# Altium PCB LTE_GPS_433_V1.0.PcbDoc (part 2 of 2)
Units mil, origin at the board's own origin, x right, y up, seen from the top; angles counter-clockwise.
Board outline 3937.01 x 2362.2 mil, 4 copper layers (Top Layer, Mid-Layer 2, POWER, Bottom Layer); 243 components, 180 nets, 856 pads, 468 vias.
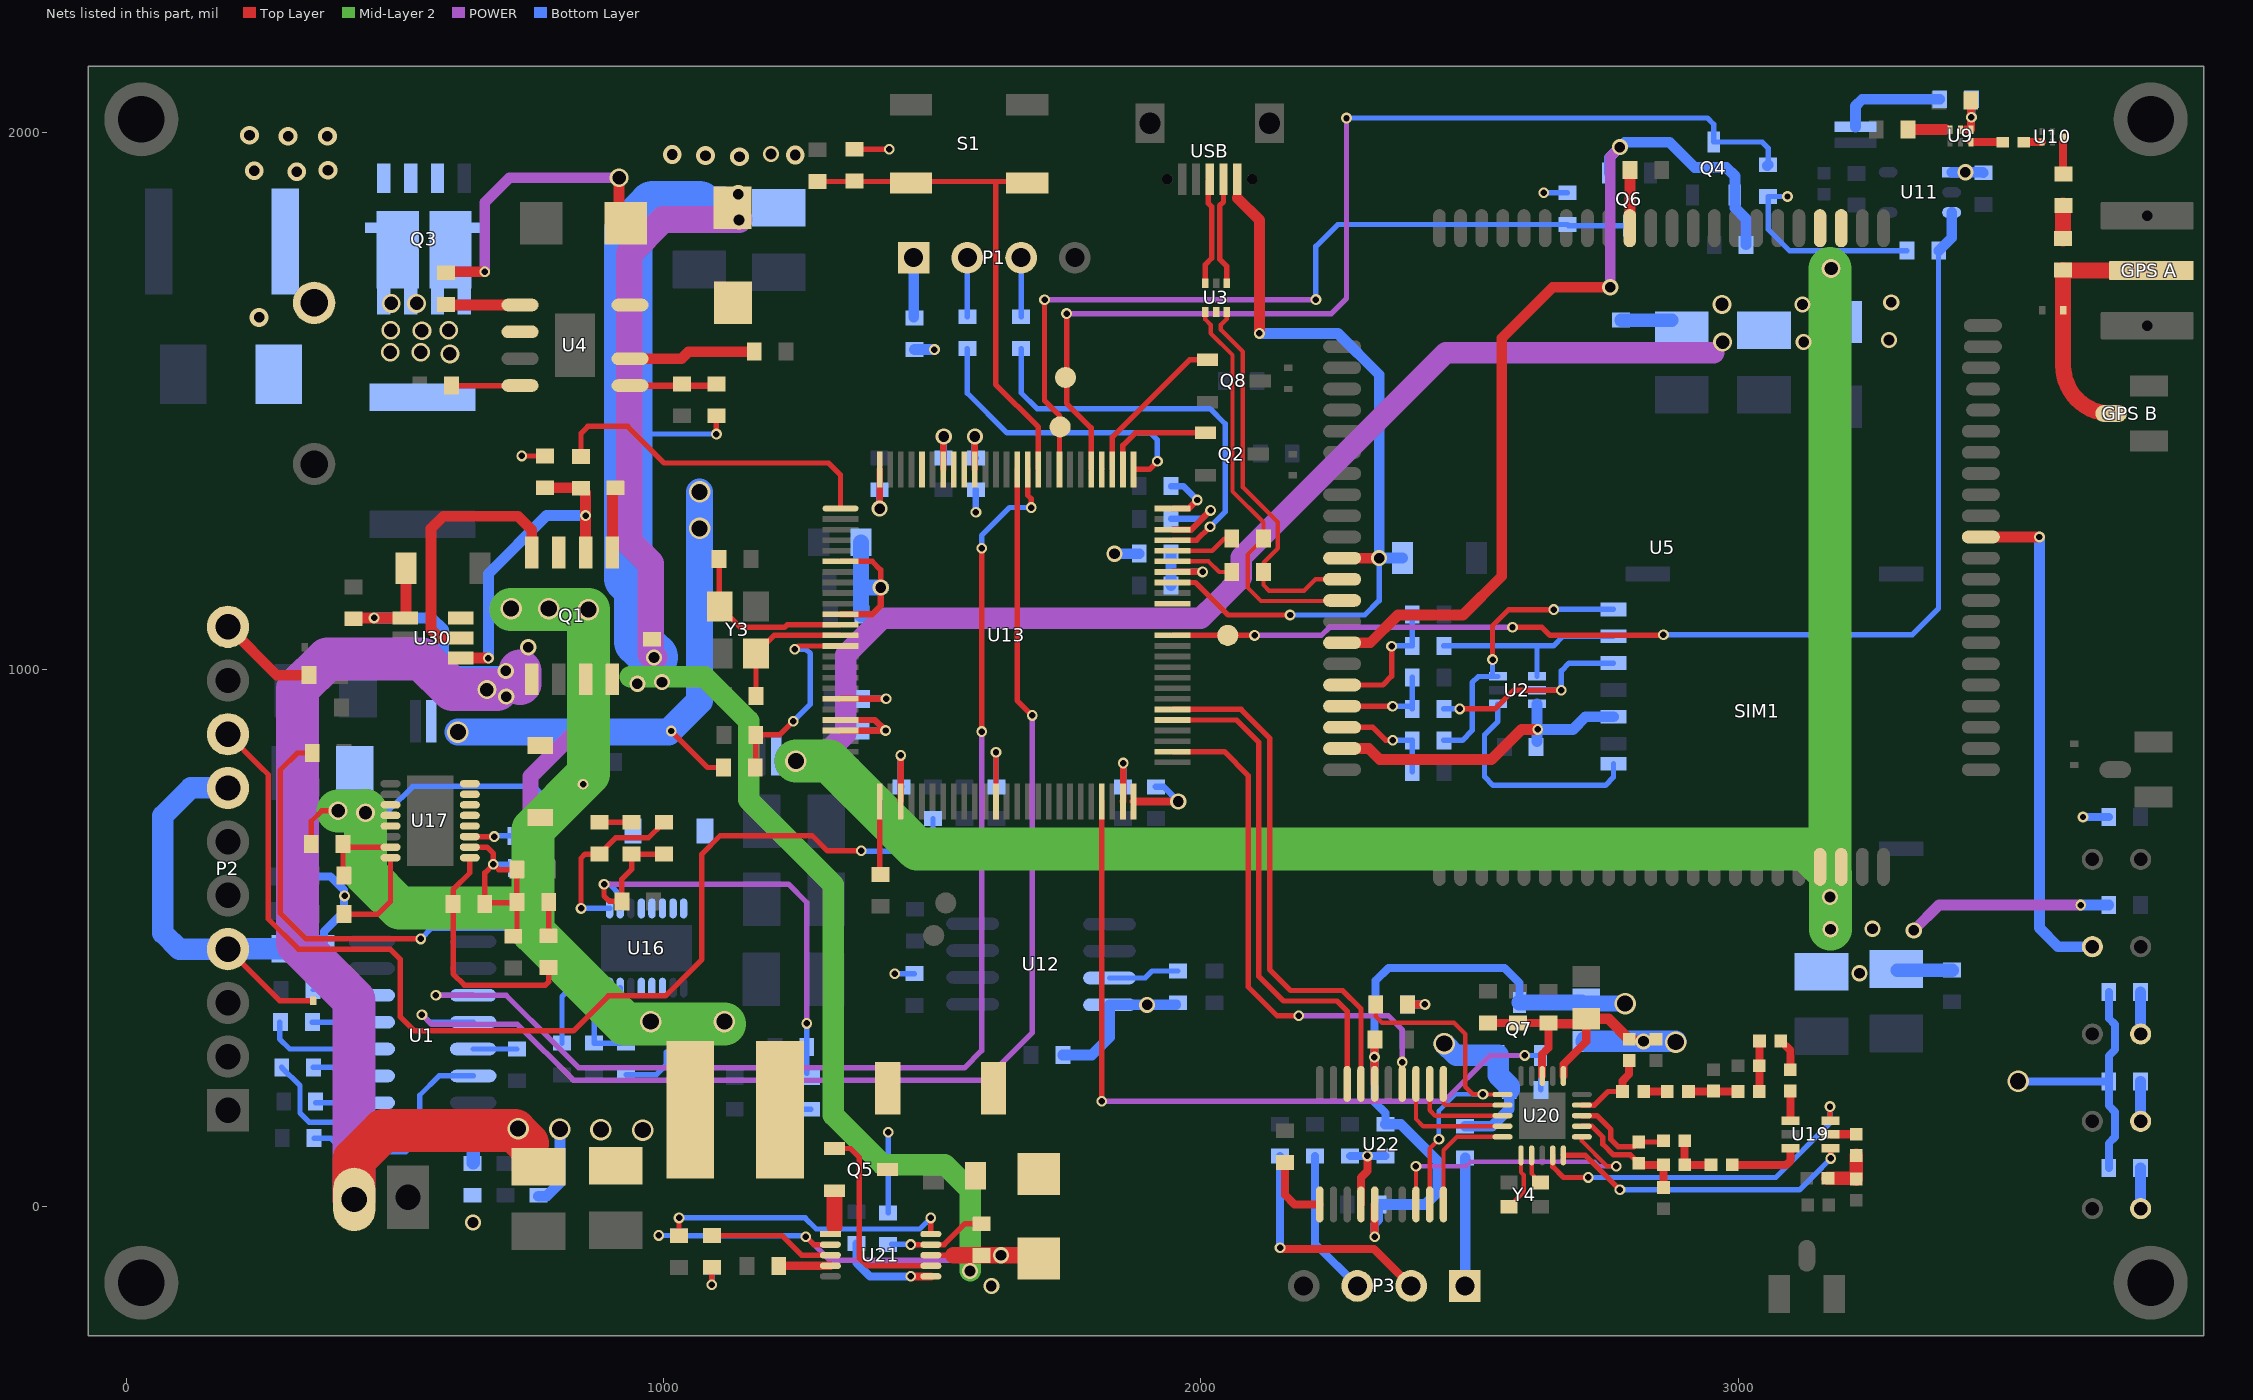
[diagram p4: the nets of this part, all layers, seen from the top]

## Via types
v1: diameter 20, hole 12, Top Layer to Bottom Layer, tented both sides, 317 vias
v2: diameter 30, hole 20, Top Layer to Bottom Layer, tented both sides, 93 vias
v3: diameter 40, hole 30, Top Layer to Bottom Layer, tented both sides, 20 vias
v4: diameter 35, hole 25, Top Layer to Bottom Layer, tented both sides, 15 vias
v5: diameter 35, hole 20, Top Layer to Bottom Layer, tented both sides, 13 vias
v6: diameter 25.98, hole 12.99, Top Layer to Bottom Layer, tented top, 8 vias
v7: diameter 30, hole 20, Top Layer to Bottom Layer, 1 vias
v8: diameter 59.06, hole 39.37, Top Layer to Bottom Layer, 1 vias

## Nets (pads, with @x,y where several pads share a name; then routed paths per layer and width w, separated by ;. In a path a pad name is that pad's centre, name@x,y a point inside that pad or via, vN(x,y) a via of type N, cw(c..) or ccw(c..) an arc to the next point about the centre after c; other vN are vias at no path point) (continued)
NetACPR_2: ACPR.2 U21.10 | length 548.5
  Top Layer w10: ACPR.2@1028.65,-53.39 v1(1028.65,-20.35) ; U21.10@1497.32,-50.35 v1@1497.32,-20.67
  Bottom Layer w10: v1(1028.65,-20.35) 1263.35,-20.35 1284,-41 1476.67,-41 v1(1497.32,-20.35)
NetAdapter_1: Adapter.1 C93.1 D3.2 Q3.1 Q3.2 Q3.3
  other v5: 247,1656 317,1927 238,1929 375,1930 301,1993 374,1993 229,1995
NetBACK_1: BACK.1 R39.2 | length 76.1
  Bottom Layer w20: R39.2@3749.06,73 3749.06,-2.74 BACK.1@3749.32,-3
NetC2_1: C2.1 Q3.5 Q3.6 Q3.7 Q3.8 U4.2
  other v4: 602,1588 491,1591 548,1591 550,1631 492,1632 600,1632 493,1682 540,1682
NetC33_1: C33.1 R21.1 U9.4 U9.5 | length 100.4
  Top Layer w15: 3423,2005.62 U9.4@3433.69,2005.62 C33.1@3433.69,2062
  Bottom Layer w15: v1(3434.32,2028.63) R21.1@3434.32,2062
NetC35_1: C35.1 R22.2 | length 60.6
  Top Layer w30: R22.2@3605,1803.06 C35.1@3605,1863.68
NetC35_2: C35.2 U10.1 | length 68.6
  Top Layer w15: C35.2@3605,1923.37 U10.1@3605,1992
NetC36_1: C36.1 U9.6 | length 69.3
  Top Layer w20: C36.1@3316.69,2005.62 3386,2005.62
NetC37_1: C37.1 D9.2 L9.1 U4.8 | length 537.3
  Top Layer w20: C37.1@600.32,1741 v1(667,1741) ; D9.2@917,1843.48 v4(917,1916)
  POWER w20: v1(667,1741) 667,1870 713,1916 v4(917,1916)
NetC37_2: C37.2 U4.1 | length 127.7
  Top Layer w20: C37.2@604.94,1679 U4.1@732.64,1679
NetC40_1: C40.1 C41.1 C161.2 D12.K L17.1 Q1.5 R27.2 U30.1 VBAT.2 | length 2524.9
  Top Layer w20: C161.2@423,1097.06 423.52,1096.53 v1(461,1096.53) U30.1@519.03,1096.53 520.2,1097.71 D12.K@520.2,1189
  Top Layer w80: VBAT.2@424,14.06 424,88 478,142 621.22,142 692.78,142 723,142 747,118
  POWER w80: VBAT.2@424,14.06 424,385 318.32,490.68 318.32,964.32 374,1020 550,1020 607,963 v4(671,963) 690,963 ; 733,974 733,998
  Bottom Layer w20: v1(461,1096.53) 568.47,1096.53 590,1075 590,1019 612.27,996.73 704.73,996.73 v2(706,998) ; R27.2@767,19.94 781.94,19.94 807,45 v3(807,145)
  other v2: 707,950 748,1042
  other v3: 961,143 883,144 729,146
NetC46_2: C46.2 C96.1 L14.2 | length 95.2
  Top Layer w25: L14.2@3167.21,53.63 C46.2@3218.37,53.63 ; C46.2@3220,52 C96.1@3220,96
NetC49_2: C49.2 U13.73 | length 165.6
  Top Layer w12: U13.73@1947.37,1260.85 1982.15,1260.85 v1(2018,1296.7)
  Bottom Layer w12: C49.2@1944.37,1281 2002.3,1281 v1(2018,1296.7)
NetC50_2: C50.2 U13.49 | length 115.9
  Top Layer w12: U13.49@1854.85,754.95 1855.32,755.41 v1(1855.32,826.32)
  Bottom Layer w12: C50.2@1855.32,782 v1(1855.32,826.32)
NetC64_1: C64.1 U1.1 | length 200.9
  Bottom Layer w10: C64.1@289,260 323,226 323,175 340,158 387,158 401,144 412,144
NetC64_2: C64.2 U1.3 | length 115.1
  Bottom Layer w10: C64.2@348.06,260 385,260 401,244 U1.3@456.51,244
NetC65_1: C65.1 U1.4 | length 210.4
  Bottom Layer w10: C65.1@285.06,344 285.06,312.94 304,294 U1.4@456.51,294
NetC65_2: C65.2 U1.5 | length 110.5
  Bottom Layer w10: C65.2@346.06,344 U1.5@456.51,344
NetC66_1: C66.1 U1.2 | length 139
  Bottom Layer w10: 386.51,194 352,194 U1.2@456.51,194
NetC67_1: C67.1 U1.6 | length 113.7
  Bottom Layer w8: C67.1@347,404 383,404 393,394 U1.6@456.51,394
NetC70_1: C70.1 U4.6 | length 236.7
  Top Layer w20: U4.6@937.36,1579 1033,1579 1046,1592 C70.1@1168.66,1592
NetC80_2: C80.2 R50.1 | length 71
  Bottom Layer w10: C80.2@1203.32,182 R50.1@1274.32,182
NetC81_1: C81.1 R55.1 | length 60
  Top Layer w10: R55.1@880.32,716 C81.1@940.31,716
NetC81_2: C81.2 C82.2 R49.1 R50.2 R58.2 U16.10 | length 987.5
  Top Layer w10: v1(889,601) 889,579 899,569 R58.2@922.26,569 922.26,610.26 940.31,628.31 C81.2@940.31,656.94 C82.2@1000.31,656.94
  POWER w10: v1(889,601) 1232,601 1266.32,566.68 v1(1266.32,341.68)
  Bottom Layer w10: v1(889,601) 899,601 919.1,580.9 U16.10@919.1,555.82 ; R50.2@1266.32,249.05 R49.1@1266.32,298 v1(1266.32,341.68)
NetC82_1: C82.1 R55.2 U16.9 | length 328.4
  Top Layer w10: v1(846.18,555.82) 846.18,649.18 853.94,656.94 R55.2@880.32,656.94 910.37,687 971.31,687 C82.1@1000.31,716
  Bottom Layer w10: v1(846.18,555.82) U16.9@899.42,555.82
NetC84_2: C84.2 R62.1 | length 960.1
  Top Layer w10: C84.2@345.94,845 318,845 286,813 286,547 334,499 v1(548,499)
  Bottom Layer w10: v1(548,499) 568,519 755,519 783.32,547.32 R62.1@783.32,631
NetC87_1: C87.1 R63.1 | length 63.3
  Top Layer w10: R63.1@785.32,505 786,505.68 C87.1@786,568
NetC87_2: C87.2 C88.2 R61.1 R62.2 R66.2 U17.10 | length 431.2
  Top Layer w10: U17.10@639.13,669.79 671.21,669.79 683,658 v1(683,638) ; C88.2@667.06,564 667.06,622.06 v1(683,638) ; C88.2@667.06,566 725.26,566 726.26,567 726.26,599 726.26,628 693,628 v1(683,638) ; R66.2@720,504.06 726.94,511 C87.2@726.94,568
  Bottom Layer w10: v1(683,638) 717.26,638 R62.2@724.26,631 R62.2@726.26,629
NetC88_1: C88.1 R63.2 U17.9 | length 445.1
  Top Layer w10: U17.9@639.13,650.1 639.13,622.13 608,591 C88.1@608,564 608,434 629,413 780,413 786,419 R63.2@786,445.94
NetC96_2: C96.2 U19.5 | length 47.2
  Top Layer w15: U19.5@3172.77,135.37 C96.2@3220,135.37
NetC98_1: C98.1 C100.2 L13.2 | length 92.3
  Top Layer w15: C100.2@2907.47,215.01 L13.2@2999.73,215.01
NetC99_1: C99.1 L13.1 L15.2 | length 94.3
  Top Layer w15: L13.1@3039.1,215.01 3039.95,215.85 L15.2@3039.95,309
NetC100_1: C100.1 L12.1 | length 44
  Top Layer w15: L12.1@2824.1,215.01 C100.1@2868.1,215.01
NetC101_1: C101.1 U19.1 | length 55.5
  Top Layer w15: C101.1@3097.32,216 3097.32,160.87 U19.1@3097.6,160.59
NetC101_2: C101.2 L15.1 | length 61.1
  Top Layer w15: L15.1@3079.32,309 3097.32,291 C101.2@3097.32,255.37
NetC102_1: C102.1 L16.1 U20.3 | length 191.2
  Top Layer w10: U20.3@2709.13,170 2737,170 2763,144 2763,126 2777,112 2806,112 L16.1@2815,121 2858.74,121 C102.1@2861.1,123.36
NetC102_2: C102.2 C103.1 L6.1 | length 94
  Top Layer w15: C102.2@2900.47,123.36 L6.1@2900.47,78.36 C103.1@2949.47,78.36
NetC103_2: C103.2 U19.3 | length 135
  Top Layer w15: C103.2@2988.84,78.36 3085.36,78.36 ccw(c3085.36,91) 3098,91 cw(c3098,91.4) 3097.6,91.4 U19.3@3097.6,109.41
NetC104_2: C104.2 L6.2 L16.2 U20.2 | length 231.4
  Top Layer w10: U20.2@2709.13,150.32 2727.68,150.32 2748,130 2748,121 2748,117 2768,97 2799.63,97 L16.2@2815,81.63
  Top Layer w15: L16.2@2815,81.63 2818.27,78.36 L6.2@2861.1,78.36 2861.1,36.47 C104.2@2861,36.37
NetC105_2: C105.2 D11.2 R71.2
NetC106_1: C106.1 R72.2 U21.9 | length 183.1
  Top Layer w10: v1(1460.03,-70.03) U21.9@1497.32,-70.03 1521.97,-70.03 1561,-31 C106.1@1592,-31
  Bottom Layer w10: R72.2@1424.37,-69.35 v1@1459.35,-69.35
NetC107_2: C107.2 U21.4 | length 96.5
  Top Layer w15: C107.2@1214.06,-110 1214.65,-109.4 U21.4@1310.32,-109.4
NetCE_1: CE.1 R25.1 U11.3 U13.63 | length 2205.7
  Top Layer w10: U13.63@1947.37,1064 CE.1@2050,1064 v1(2100,1064) ; v1(2580,1079) 2635,1079 2650,1064 v1@2861,1064
  POWER w10: v1(2100,1064) 2224,1064 2239,1079 v1(2580,1079)
  Bottom Layer w10: v1(2861,1065) 3324,1065 3373,1114 3373,1779.68 R25.1@3373.32,1780
  Bottom Layer w20: R25.1@3373.32,1780 3397.42,1804.11 U11.3@3397.42,1851.2
NetCHG_1: CHG.1 R73.2 | length 64.7
  Top Layer w10: v1(1089.57,-144.57) CHG.1@1089.57,-112.22
  Bottom Layer w10: v1(1089.57,-144.57) R73.2@1089.57,-112.22
NetCHG_2: CHG.2 U21.3 | length 235.9
  Top Layer w10: CHG.2@1089.57,-53.16 1220.16,-53.16 1256.72,-89.72 U21.3@1310.32,-89.72
NetD2_K: D2.K U5.11 U13.68 USB.1 | length 1512.1
  Top Layer w10: U13.68@1947.37,1162.43 1990,1162.43 2050.42,1102 v1(2166,1102) ; 2067.68,1878.32 USB.1@2067.68,1913
  Top Layer w20: 2067.68,1878.32 2109,1837 v1(2109,1626) ; U5.11@2262.84,1207.8 v2(2331.8,1207.8)
  Bottom Layer w10: v1(2166,1102) 2305,1102 2331.8,1128.8 v2(2331.8,1207.8)
  Bottom Layer w20: v1(2109,1626) 2255,1626 2331.8,1549.2 v2(2331.8,1207.8) 2332,1208 D2.K@2375.2,1208
NetD7_K: "GPS A.1" "GPS B.1" D7.K R22.1 | length 481.3
  Top Layer w30: R22.1@3605,1744 3605,1566.32 ccw(c3694.32,1566.32) 3694.32,1477 ; R22.1@3606,1743 3769.32,1743
NetFB1_1: FB1.1 U1.16 | length 61.5
  Bottom Layer w25: FB1.1@645.49,82.49 U1.16@645.49,144
NetGPS_1: GPS.1 R37.2 | length 78.1
  Bottom Layer w20: R37.2@3749.06,400 3749.06,322.26 GPS.1@3749.32,322
NetIRQ_1: IRQ.1 R70.2 | length 65.1
  Top Layer w15: IRQ.1@2384.43,377 v1(2417,377)
  Bottom Layer w15: R70.2@2384.43,377 v1(2417,377)
NetL5_2: L5.2 L12.2 U20.4 | length 148.8
  Top Layer w10: U20.4@2709.13,189.68 2732.68,189.68 2758.01,215.01 L12.2@2784.73,215.01
  Top Layer w15: L12.2@2784.73,215.01 2784.73,234.73 2797.1,247.1 L5.2@2797.1,272.64
NetL8_1: L8.1 U9.3 | length 58.6
  Top Layer w15: U9.3@3433.69,1982 L8.1@3492.32,1982
NetL8_2: L8.2 U10.4 | length 33.8
  Top Layer w15: L8.2@3531.84,1982.16 U10.4@3565.63,1982.16
NetL10_1: L10.1 U16.15 U16.16
NetL10_2: L10.2 U16.12 U16.13 U16.14
NetL11_1: L11.1 U17.15 U17.16
NetL11_2: L11.2 U17.12 U17.13 U17.14
NetL17_2: L17.2 Q5.2 U21.1 | length 58.3
  Top Layer w30: L17.2@1215.32,179.72 L17.2@1216.64,181.05 ; 1318,-36.44 Q5.2@1318,20
NETLIGHT: 4G.2@3659.55,484.5 U5.51 | length 950.1
  Top Layer w20: U5.51@3451.82,1247.17 v1(3560.83,1247.17)
  Bottom Layer w20: v1(3560.83,1247.17) 3560.83,519.17 3595.5,484.5 4G.2@3659.55,484.5
NetP1_1: P1.1 R17.2 | length 112.6
  Bottom Layer w10: R17.2@1465.32,1656.74 R17.2@1467,1655.06
  Bottom Layer w20: R17.2@1465.32,1656.74 P1.1@1465.32,1767
NetP1_2: P1.2 R9.2 | length 109.9
  Bottom Layer w10: R9.2@1565.32,1657.06 P1.2@1565.32,1767
NetP1_3: P1.3 R10.2 | length 109.9
  Bottom Layer w10: R10.2@1665.32,1657.06 P1.3@1665.32,1767
NetP2_8: P2.8 R5.2 | length 2086.3
  Top Layer w10: P2.8@189,880 248,821 264,805 264,536 320,480 491,480 510,461 510,354 536,328 832,328 897,393 1003,393 1071,461 1071,657 1105,691 1277,691 1305,663 v1(1368,663)
  Bottom Layer w10: v1(1368,663) 1369,662 1479,662 1501.31,684.31 R5.2@1501.31,722.94
NetP2_10: P2.10 R1.2 | length 188.2
  Top Layer w20: P2.10@189,1080 190,1080 280,990 R1.2@339.94,990
NetP3_1: P3.1 R18.2 | length 238.5
  Bottom Layer w20: P3.1@2491.32,-147 2492,-146.32 R18.2@2492,91.26
NetP3_2: P3.2 R8.2 | length 444.2
  Top Layer w15: v1(2147.32,-75.68) 2149.61,-77.98 2322.3,-77.98 P3.2@2391.32,-147
  Bottom Layer w15: v1(2147.32,-75.68) R8.2@2147.32,95
NetP3_3: P3.3 R11.2 | length 274.6
  Bottom Layer w15: R11.2@2212.65,95 2212.65,-68.33 P3.3@2291.32,-147
NetPWR_1: PWR.1 R36.2 | length 74.6
  Bottom Layer w20: R36.2@3749.06,234 3749.06,159.76 PWR.1@3749.32,159.5
NetQ1_2: Q1.2 R69.1 R118.1 U30.4 | length 612.7
  Top Layer w20: U30.4@622.18,1021.73 v1(673.73,1021.73) ; R69.1@778.97,1338.94 845.06,1338.94 R118.1@846,1338 ; Q1.2@854.62,1218.4 v1(854.62,1287) R118.1@854.62,1329.38
  Bottom Layer w20: v1(673.73,1021.73) 673.73,1178.73 782,1287 v1(854.62,1287)
NetQ1_4: Q1.4 U30.5 | length 499.5
  Top Layer w20: U30.5@622.18,1059.13 582.87,1059.13 567,1075 567,1263 590,1286 729,1286 754.62,1260.38 Q1.4@754.62,1218.4
NetQ2_1: Q2.1 U13.77 | length 207.8
  Top Layer w10: U13.77@1854.85,1373.05 1854.85,1417.85 1878,1441 Q2.1@2008.32,1441
NetQ4_3: Q4.3 R28.1 S_TX.1 U13.80 | length 2048.8
  Top Layer w10: 1750,1581 1750,1571 ; v1(1750,1663) 1750,1571 ; U13.80@1795.8,1373.05 1795.8,1450.2 1750,1496 1750,1571
  POWER w10: v1(1750,1663) 2243,1663 2271,1691 v1(2271,2027)
  Bottom Layer w10: v1(2271,2027) 2943,2027 2954.63,2015.37 Q4.3@2954.63,1982.43 3044.57,1982.43 3056,1971 R28.1@3056,1940
  Bottom Layer w20: R28.1@3054,1938 R28.1@3056,1940
NetQ5_1: Q5.1 U21.7 | length 379.7
  Top Layer w10: Q5.1@1318,109 1348,109 1364,93 1364,-94.69 1378.39,-109.09 1497.01,-109.09 U21.7@1497.32,-109.4
NetQ5_3: Q5.3 R71.1 R72.1 | length 150
  Bottom Layer w10: R72.1@1418,-11 v1(1418,139)
NetQ6_3: Q6.3 R24.2 S_RX.1 U13.83 | length 1536.2
  Top Layer w10: v1@1710,1690 v1(1709,1689) 1709,1501 1736.74,1473.26 U13.83@1736.74,1373.05
  POWER w10: v1(1709,1689) v1@2214.06,1689
  Bottom Layer w10: v1@2214,1689 v1(2214.06,1689.06) 2214.06,1788.06 2254.94,1828.94 R24.2@2682,1828.94 2684.37,1826.57 Q6.3@2799.37,1826.57
NetQ7_1: Q7.1 R79.1 U13.47 | length 1474.4
  Top Layer w10: v1(1815.48,197) U13.47@1815.48,754.95
  POWER w10: v1(1815.48,197) 2453,197 2538.06,282.06 v1(2602.94,282.06)
  Bottom Layer w10: v1(2602.94,282.06) Q7.1@2632.32,282.06 2632.32,218.68 R79.1@2633,218
NetQ8_1: Q8.1 U13.78 | length 296.5
  Top Layer w10: U13.78@1835.16,1373.05 1835.16,1433.16 1979,1577 Q8.1@2012,1577
NetR2_1: R2.1 SIM1.3 U2.3 | length 533.5
  Top Layer w10: v1(2542.9,1018.9) 2542.9,1081.9 2573,1112 v1(2657,1112)
  Bottom Layer w10: R2.1@2452.32,868.6 2483,868.6 2486.6,868.6 2505,887 2505,976 2516.59,987.59 U2.3@2542.9,987.59 ; v1(2542.9,1018.9) U2.3@2542.9,987.59 ; U2.3@2552.9,987.59 U2.3@2542.9,987.59 ; v1@2657.4,1112.4 SIM1.3@2768,1112.4
NetR3_2: R3.2 U5.72 | length 108.3
  Top Layer w20: U5.72@2798.28,1821.98 2798.94,1822.65 R3.2@2798.94,1930
NetR4_1: R4.1 R30.1 U13.69 | length 173.5
  Top Layer w12: U13.69@1947.37,1182.11 v1(2003.11,1182.11)
  Bottom Layer w12: 1944.37,1182 1944.48,1182.11 v1(2003.11,1182.11)
  Bottom Layer w20: R30.1@1944.37,1157 1944.37,1182 R4.1@1944.37,1216
NetR14_2: R14.2 U1.14 | length 411.5
  Bottom Layer w10: R14.2@349.06,128 380,128 405,103 520,103 546,129 546,208 582,244 U1.14@645.49,244
NetR15_2: R15.2 U1.13 | length 81.5
  Bottom Layer w10: U1.13@645.49,294 726.94,294 R15.2@727,294.06
NetR16_1: R16.1 SIM1.2 U2.5 | length 421.3
  Top Layer w10: v1(2481.8,927.2) 2547.52,927.2 2582.32,962 v1(2671,962) v1@2675,962
  Bottom Layer w10: R16.1@2452.32,927.2 v1(2481.8,927.2) ; U2.5@2625.73,962 v1(2671,962) 2671,998 2685.4,1012.4 SIM1.2@2768,1012.4
NetR19_1: R19.1 SIM1.7 U2.4 | length 380
  Bottom Layer w10: R19.1@2452.32,1044.4 2625.73,1044.4 ; U2.4@2625.73,987.59 2625.73,1044.4 ; SIM1.7@2768,1062.4 2727,1062.4 2674,1062.4 2656,1044.4 2625.73,1044.4
NetR20_1: R20.1 U13.70 | length 118.1
  Top Layer w8: U13.70@1947.37,1201.8 2014.21,1201.8 2034,1182 R20.1@2057.32,1182
NetR23_1: R23.1 U13.71 | length 121.3
  Top Layer w8: U13.71@1947.37,1221.48 2021.11,1221.48 2043.63,1244 R23.1@2057.32,1244 R23.1@2059.32,1244
NetR26_2: R26.2 U12.7 | length 132.5
  Bottom Layer w10: U12.7@1829.89,426.32 1896.32,426.32 1909.31,439.31 R26.2@1957,439.31
NetR31_1: R31.1 U13.37 | length 156.1
  Top Layer w10: U13.37@1618.63,754.95 v1(1618.63,846.37)
  Bottom Layer w10: v1(1618.63,846.37) 1618.63,782.68 R31.1@1619.31,782
NetR32_1: R32.1 U13.91 | length 102.3
  Top Layer w12: U13.91@1579.26,1373.05 v2(1579.26,1434.26)
  Bottom Layer w12: v2(1579.26,1434.26) 1579.26,1396.05 R32.1@1581.32,1394
NetR33_1: R33.1 U13.94 | length 100.5
  Top Layer w12: U13.94@1520.2,1373.05 v2@1520.2,1433.2
  Bottom Layer w12: R33.1@1521.32,1394 v2(1521.32,1434.32)
NetR42_1: R42.1 R64.1 U4.5 | length 162.1
  Top Layer w12: U4.5@937.36,1529 1095.2,1529 R42.1@1098.2,1532
NetR44_2: R44.2 U4.4 | length 127.6
  Top Layer w10: R44.2@605.06,1529 732.53,1529 U4.4@732.58,1528.94
  Top Layer w12: U4.4@732.58,1528.94 U4.4@732.64,1529
NetR48_1: R48.1 R59.2 U17.7 | length 152.4
  Top Layer w10: R48.1@403.06,612 R59.2@403.06,676 ; R59.2@403.06,669.79 U17.7@491.5,669.79
NetR51_2: R51.2 R56.1 U16.7 | length 193
  Bottom Layer w10: U16.7@919.1,408.18 919.1,386.1 903,370 886,370 870.57,354.57 R56.1@870.57,305 R51.2@930.31,305
NetR52_1: R52.1 U13.26 | length 136.7
  Top Layer w10: U13.26@1402.09,754.95 1402.09,620.91 R52.1@1404,619
NetR57_1: R57.1 U16.8 | length 182.2
  Bottom Layer w10: R57.1@810.82,305 810.82,391.82 827.18,408.18 U16.8@899.42,408.18
NetR60_2: R60.2 U17.11 | length 84.8
  Top Layer w10: U17.11@639.13,689.47 v1(684.47,689.47)
  Bottom Layer w10: v1(684.47,689.47) 686,691 R60.2@723.26,691
NetR65_1: R65.1 U17.8 | length 177.8
  Top Layer w10: R65.1@405,545 468,545 491.5,568.5 U17.8@491.5,650.1
NetR68_1: R68.1 U22.1 | length 132.6
  Top Layer w15: R68.1@2156.32,83 2156.32,22.68 2174.2,4.8 U22.1@2221.16,4.8
NetR75_2: R75.2 U21.6 | length 184.7
  Top Layer w15: v1(1460.09,-129.09) U21.6@1497.32,-129.09
  Bottom Layer w15: R75.2@1359,-68.06 1359,-104 1384.09,-129.09 v1(1460.09,-129.09)
NetR118_2: R118.2 U13.1 | length 631.5
  Top Layer w10: R118.2@846,1397.06 846,1440 859,1453 933,1453 1001,1385 1307,1385 1329.26,1362.74 U13.1@1329.26,1300.22
NetSIM1_8: SIM1.8 U2.1 | length 423.6
  Bottom Layer w10: U2.1@2552.9,936.41 2552.9,903.9 2528,879 2528,801 2544,785 2753,785 2768,800 SIM1.8@2768,825
NetU1_11: U1.11 U13.86 | length 2301.9
  Top Layer w10: v1(1592,885) v1(1592,1226) ; U13.86@1677.68,1373.05 1677.68,1324.84 1684,1318.53 v1(1684,1302) v1@1685,1302
  POWER w10: v1(576,394) 707,394 797,304 842,259 1560,259 1592,291 v1(1592,885)
  Bottom Layer w10: v1(576,394) U1.11@645.49,394 ; v1(1592,1226) 1592,1250 1644,1302 v1(1684,1302)
NetU1_12: U1.12 U13.87 | length 2437.4
  Top Layer w10: U13.87@1658,1373.05 1658,943 v1(1686,915)
  POWER w10: v1(550,358) 568,340 728,340 832,236 1598,236 1686,324 v1(1686,915)
  Bottom Layer w10: v1(550,358) 564,344 U1.12@645.49,344 ; 575.49,344 U1.12@628,344
NetU3_1: U3.1 USB.2 | length 202
  Top Layer w10: USB.2@2042.09,1913 2042.09,1871.09 2035,1864 2035,1764.28 2048.32,1750.97 2048.32,1719.89 U3.1@2048,1719.57
NetU3_3: U3.3 USB.3 | length 201.8
  Top Layer w10: U3.3@2008.32,1719.57 2008.32,1754.32 2020,1766 2020,1862 2014,1868 2014,1910.5 USB.3@2016.5,1913
NetU13_52: U13.52 U22.14 | length 972.9
  Top Layer w10: U13.52@1947.37,847.47 2043.54,847.47 2088,803 2088,410 2142,356 v1(2182,356) ; U22.14@2374.7,229.2 v1(2374.7,269.7)
  POWER w10: v1(2182,356) 2349,356 2374.7,330.3 v1(2374.7,269.7)
NetU13_55: U13.55 U22.18 | length 940.1
  Top Layer w10: U13.55@1947.37,906.52 2066.48,906.52 2108,865 2108,429.34 2154,383.34 2253.66,383.34 2272.34,364.66 U22.18@2272.34,229.2
NetU13_56: U13.56 U22.17 | length 973.7
  Top Layer w10: U13.56@1947.37,926.2 2074.79,926.2 2128,873 2128,442 2167,403 2264,403 2297.93,369.07 U22.17@2297.93,229.2
NetU13_79: U13.79 | length 0.7
  Top Layer w10: U13.79@1815.48,1373.05 U13.79@1816,1373.57
NetU13_92: U13.92
NetU13_93: U13.93
NetU13_96: U13.96
NetU20_16: U20.16 Y4.3 | length 109.3
  Top Layer w8: Y4.3@2573.47,0.36 2601,27.89 2601,59.38 2595.94,64.44 U20.16@2595.94,96.18
NetU20_17: U20.17 Y4.1 | length 57.5
  Top Layer w8: U20.17@2615.63,96.18 2615.63,62.54 Y4.1@2632.53,45.64
NRST: C59.2 R6.1 U13.14 | length 400.9
  Top Layer w10: R6.1@1170.32,818 1171.37,819.06 C59.2@1171.37,879 1216,879 v1(1241,904) ; v1(1244,1038) 1250.32,1044.32 U13.14@1329.26,1044.32
  Bottom Layer w10: v1(1241,904) 1273,936 1273,1030 1265,1038 v1(1244,1038)
NRST2: C89.1 R67.2 U22.4 | length 160.5
  Top Layer w15: U22.4@2297.93,4.8 2297.93,54.93 2310,67 v1(2310,95)
  Bottom Layer w15: C89.1@2277.98,95 R67.2@2343.31,95
OSC_IN: C58.2 U13.12 Y3.3 | length 331.4
  Top Layer w10: C58.2@1103.26,1205.81 1103.26,1118.87 Y3.3@1104.32,1117.81 1143.13,1079 1225,1079 1229.68,1083.68 U13.12@1329.26,1083.68
OSC_OUT: C60.2 U13.13 Y3.1 | length 251
  Top Layer w10: C60.2@1172.06,951 1171.78,951.28 Y3.1@1171.78,1030.5 1205.28,1064 U13.13@1329.26,1064
POWER: C69.1 C75.1 C162.2 Q1.1 Q1.3 R51.1 R54.1 R59.1 R60.1 U16.3 U16.4 U16.5 U17.3 U17.4 U17.5 U30.6 | length 3663.7
  Top Layer w10: R59.1@344,676 344,718 363.5,737.5 v4(394,737.5)
  Top Layer w20: Q1.1@904.62,1218.4 C162.2@904.62,1333.6
  POWER w30: v3(860,1112) 860,909 752,801 752,516 923,345 v3(1113,345)
  Mid-Layer 2 w80: v4(394,737.5) 444.5,737.5 445,738 v4(445,734) 445,620 508,557 757,557 ; v3@716,1112 v3(860,1112) 860,806 757,703 757,557 ; 757,534 757,557 ; v3@1113,341 928,341 757,512 757,557
  Bottom Layer w10: v4(394,737.5) 444.5,737.5 445,738 488,738 533,783 759,783 782.32,759.68 R60.1@782.32,691 ; v1(850,787) R54.1@850,828 ; R51.1@930.31,245.94 985.94,245.94 1005,265 1005,288
  other v3: 976,345 716,1114 786,1114
POWER_STATE: U13.66
PWR_KEY: C1.1 R78.2 S1.1 U13.85 | length 959.9
  Top Layer w10: C1.1@1286,1909 1460.32,1909 1617,1909 1673.85,1909 S1.1@1676.85,1906 ; 1618,1908 1618,1531 1697.37,1451.63 U13.85@1697.37,1373.05
RF_IO2: U19.6 U20.19 | length 645.3
  Top Layer w10: U20.19@2655,96.18 2655,75 2675,55 v1(2721,55) ; v1(3171,187) 3171,161.99 U19.6@3172.4,160.59
  Bottom Layer w10: v1(2721,55) 3070,55 3171,156 v1(3171,187)
RF_IO3: U19.4 U20.20 | length 567.5
  Top Layer w10: U20.20@2674.69,96.18 2715.82,96.18 v1(2780,32) ; v1(3172.4,90.4) U19.4@3172.4,109.41
  Bottom Layer w10: v1(2780,32) 3114,32 3141,59 v1(3172.4,90.4)
RF_IRQ: IRQ.2 U20.11 U22.9 | length 652.2
  Top Layer w8: IRQ.2@2325.37,377 2325.37,354.63 2337,343 2471,343 2492,322 2492,224 2506,210 v1(2525,210) 2525.63,209.37 U20.11@2561.5,209.37 ; U22.9@2425.88,4.8 2425.88,108.88 v1(2443,126)
  Bottom Layer w8: v1(2443,126) 2443,179 2474,210 v1(2525,210)
RF_RST: U20.1 U22.8 | length 541.5
  Top Layer w8: U22.8@2400.29,4.8 v1(2400.29,75.71) ; U20.1@2709.13,130.63 2709.13,122.66 2755.8,76 v1(2773,76)
  POWER w8: v1(2400.29,75.71) 2493.71,75.71 2502,84 2733.01,84 2741.01,76 v1(2773,76)
SIMC_CLK: C28.1 R2.2 U5.19 | length 198.5
  Top Layer w10: U5.19@2262.84,892.84 2320.16,892.84 2344,869 v1(2357,869)
  Bottom Layer w10: v1@2357.4,868.6 R2.2@2393.26,868.6 C28.1@2393.26,810
SIMC_DATA: C29.1 R19.2 U5.17 | length 251.4
  Top Layer w10: U5.17@2262.84,971.58 2338.58,971.58 2355,988 v1(2355,1044)
  Bottom Layer w10: v1@2355.4,1044.4 R19.2@2393.26,1044.4 C29.1@2393.26,1103
SIMC_RST: C27.1 R16.2 U5.18 | length 184.3
  Top Layer w10: U5.18@2262.84,932.21 v1(2356.79,932.21) v1@2357,932
  Bottom Layer w10: v1(2356.79,932.21) R16.2@2388.25,932.21 ; R16.2@2393.26,927.2 C27.1@2393.26,985.8
SPI_MISO: U20.13 U22.12 | length 188.9
  Top Layer w8: U22.12@2425.88,229.2 2425.88,180.12 2436,170 U20.13@2561.5,170
SPI_MOSI: U20.14 U22.13 | length 232.2
  Top Layer w8: U22.13@2400.29,229.2 2400.29,163.71 2413.68,150.32 U20.14@2561.5,150.32
SPI_NSS: U20.15 U22.10 | length 221.1
  Top Layer w8: U22.10@2451.47,4.8 2451.47,105.47 2476.63,130.63 U20.15@2561.5,130.63
SPI_SCK: U20.12 U22.11 | length 147.9
  Top Layer w8: U22.11@2451.47,229.2 2451.47,192.53 2454.32,189.68 U20.12@2561.5,189.68
SWCLK: R9.1 U13.76 | length 670.6
  Top Layer w10: U13.76@1874.54,1373.05 1904.05,1373.05 v1(1919,1388)
  Bottom Layer w10: R9.1@1565.32,1598 1565.32,1514.68 1639,1441 1771,1441 ; 1878,1441 1771,1441 ; v1(1919,1388) 1919,1428 1906,1441 1771,1441
SWDIO: R10.1 U13.72 | length 769.4
  Top Layer w10: U13.72@1947.37,1241.16 1992.17,1241.16 v1(2017,1266)
  Bottom Layer w10: R10.1@1665.32,1598 1665.32,1515.68 1695,1486 2017,1486 2045,1458 2045,1294 v1(2017,1266)
USB_D_N: R20.2 U3.6 U5.12 | length 727.4
  Top Layer w8: U3.6@2048,1666 2048,1653 2037.16,1642.16 2037.16,1633 2078,1592.16 2078,1340 2143,1275 2143,1226 2116.37,1199.37 R20.2@2116.37,1182 2116.37,1157.63 2126.94,1147.06 2192.06,1147.06 2213.43,1168.43 U5.12@2262.84,1168.43
USB_D_P: R23.2 U3.4 U5.13 | length 756.5
  Top Layer w8: U3.4@2008.32,1666 2008.32,1652 2018.16,1642.16 2018.16,1626.54 2059,1585.7 2059,1332.13 2116.37,1274.76 R23.2@2116.37,1244 2087,1214.63 2087,1153.06 2112,1128.06 U5.13@2261.84,1128.06
  Top Layer w10: U5.13@2261.84,1128.06 U5.13@2262.84,1129.06
USB_VBUS: U3.5 | length 0.2
  Top Layer w10: U3.5@2028.16,1666.16 U3.5@2028.32,1666
VCC_ANTENA_1.8V: 1.8V.2 R21.2 | length 201
  Bottom Layer w20: 1.8V.2@3218.32,2010.53 3218.32,2049.31 3231,2062 R21.2@3375.26,2062
VCC_DEV: D13.2 F2.2 P2.4 P2.7 R34.2 | length 902.2
  Top Layer w10: P2.4@189,480 285,384 D13.2@347.63,384
  Top Layer w12: P2.4@171.29,480 P2.4@189,480
  Bottom Layer w10: F2.2@289.26,481 341.06,532.8 R34.2@341.06,551
  Bottom Layer w40: P2.7@189,780 120,780 68,728 68,510 98,480 P2.4@189,480 190,481 F2.2@289.26,481
VCC_LTE_3.8V: 3.8V.2 C22.1 C25.1 C26.1 C30.1 C31.1 C32.1 D1.2 R35.1 U5.38 U5.39 U5.62 U5.63 | length 5951.4
  POWER w20: v2(3327,515) 3374,562 v1(3638,562)
  POWER w40: v3(1246,830) 1288,830 1339,881 1339,1028 1407,1096 2000,1096 2031.86,1127.86 2075,1171 2075,1209.5 2455.5,1590 2955,1590
  Mid-Layer 2 w80: v3(1246,830) 1308,830 1472,666 3127,666 3171,622 v4@3171,1747 ; v2(3172,517) 3172,621
  Bottom Layer w20: v1(3638,562) R35.1@3690,562
  Bottom Layer w25: C26.1@2782,1651 C22.1@2876.32,1651 ; C31.1@3296.32,441 C32.1@3398.32,441
  other v2: 3226,435 3250,518 3171,577 3122,1610 3281,1614 3120,1680 3285,1684
  other v4: 2971,1610 2970,1680 3173,1747
VCC_MCU2_3.3V: C90.2 C91.2 FB5.2 Q7.3 R67.1 R70.1 U22.5 U22.16 | length 1303.3
  Top Layer w15: v1(2323.52,-55.48) U22.5@2323.52,4.8 ; U22.16@2323.52,229.2 2323.52,311.26 C91.2@2324.26,312
  Bottom Layer w15: R70.1@2323,374.63 v1(2323,279) 2323,195 2343.31,174.69 R67.1@2343.31,154.06 ; v1(2323.52,-55.48) 2323.52,-32.48 2331.39,-24.61 C90.2@2331.39,4.8 ; R70.1@2325.37,377 2325.37,421.37 2349,445 2565,445 2592.94,417.06 Q7.3@2592.94,380.48
  Bottom Layer w20: C90.2@2331.39,4.8 2417.8,4.8 2441,28 2441,85 2371.94,154.06 R67.1@2343.31,154.06
  Bottom Layer w30: Q7.3@2592.94,380.48 FB5.2@2708.26,380.48 ; FB5.2@2710,378.74 v3(2789.74,378.74)
VCC_MCU_3.3V: 3.3V.2 C43.2 C47.1 C48.1 C51.2 C52.2 C53.2 C54.2 C55.2 C56.2 C57.1 C62.2 C68.2 F2.1 FB1.2 Q7.2 R4.2 R6.2 R17.1 R18.1 R24.1 R25.2 R26.1 R28.2 R32.2 R36.1 R37.1 R38.1 R39.1 R40.2 R69.2 R78.1 R79.2 U11.1 U12.8 U13.6 U13.11 U13.19 U13.21 U13.22 U13.28 U13.50 U13.75 U13.100 | length 4444.1
  Top Layer w10: v1(736,1398) R69.2@778.97,1398 ; v1(1014,886) 1082,818 R6.2@1111.26,818 ; U13.6@1329.26,1201.8 1388.2,1201.8 1404,1186 v2(1404,1153) ; R78.1@1355,1969 v1(1420,1969)
  Top Layer w12: U13.22@1329.26,886.84 v1@1412.84,886.84 ; U13.21@1329.26,906.52 1393.15,906.52 v1@1412.84,886.84 ; U13.19@1329.26,945.89 1413.89,945.89 v1(1414,946) ; U13.11@1329.26,1103.37 1388.37,1103.37 1404,1119 v2(1404,1153) ; v2(1402.09,1299.91) U13.100@1402.09,1373.05 ; v1(1413,887) v1@1412.84,886.84 ; U13.28@1441.47,754.95 v1(1441.47,840.53) ; U13.75@1947.37,1300.22 1977.22,1300.22 v1(1993,1316)
  Top Layer w15: U13.50@1874.54,754.95 v2(1957.95,754.95)
  Bottom Layer w10: v1(1430.37,434.37) R40.2@1467,434.37 ; R26.1@1953.06,376.32 R26.1@1957,380.26 ; v1(2638,1888) R24.1@2682,1888 ; v1(3091.94,1880.94) R28.2@3056,1880.94 3056,1820 3096,1780 R25.2@3314.26,1780
  Bottom Layer w12: C55.2@1369.37,887 v1(1413,887) ; C54.2@1370.37,946 v1(1414,946) ; C53.2@1401.32,1334.94 1401.32,1300.68 v2(1402.09,1299.91) ; v1(1441.47,840.53) 1441.47,782.85 C47.1@1442.32,782 ; v1(1581.32,1293.32) R32.2@1581.32,1334.94 ; C56.2@1916.32,782 1930.89,782 v2(1957.95,754.95) ; C52.2@1944.37,1342 1967,1342 v1(1993,1316)
  Bottom Layer w15: C68.2@340.06,615 380,615 405,590 405,550 368,513 F2.1@368,481 F2.1@362.87,481 ; v3(3521,234) R36.1@3690,234 ; v1(3642,726) R38.1@3690,726 ; R39.1@3690,73 3690,118.55 3701.74,130.29 3701.74,176.97 3690,188.71 R36.1@3690,234 ; R37.1@3690,400 3690,351.21 3701.74,339.47 3701.74,292.79 3690,281.05 R36.1@3690,234
  Bottom Layer w20: R17.1@1467,1596 v1(1504,1596) ; C62.2@1743.06,283 1797,283 1829.89,315.89 U12.8@1829.89,376.32 R26.1@1953.06,376.32 ; v2(1839,1216) R4.2@1885.32,1216 ; R18.1@2492,150.32 2541.81,150.32 2573.94,182.45 R79.2@2573.94,218 ; U11.1@3397.42,1926 3455.37,1926 C43.2@3456.32,1925.06
  Bottom Layer w30: C57.1@1367.32,1237 1367.32,1153 1367.32,1105 C48.1@1369.32,1103 ; C51.2@1377.37,1153 v2(1404,1153)
  Bottom Layer w40: v3(2453,304) 2474.94,282.06 Q7.2@2553.57,282.06 2553.57,245.06 2573.94,224.69 R79.2@2573.94,218
  Bottom Layer w50: v3(617,884) 1009,884 1067,942 ; 1067,1043 1067,942 ; v3(1067,1331) 1067,942
  other v1: 406,579
  other v2: 645,-29 1900,376.32 3423,1926
  other v3: 1067,1263
VCC_OUT: C34.1 C61.1 C106.2 C160.2 D11.1 L9.2 Q1.7 Q1.8 R42.2 R73.1 R74.1 U21.2 U21.8 | length 4517.7
  Top Layer w10: v1(1098.2,1438.8) R42.2@1098.2,1472.94 ; v1(1264.66,-55.35) 1279.34,-70.03 U21.2@1310.32,-70.03 ; U21.8@1497.32,-89.72 1539,-89.72 ; D11.1@1691.72,-89.72 D11.1@1698,-96
  Top Layer w30: 1539,-89.72 v2(1628,-89.72) D11.1@1691.72,-89.72
  POWER w10: v1(1264.66,-55.35) 1308.3,-99 1550,-99 v2(1570,-119)
  POWER w50: v2(982,1023) 976,1029 976,1198 936,1238 936,1775 999,1838 v5@1140,1838
  Mid-Layer 2 w40: 938,987 997,987 1076,987 1158,905 1158,758 1316,600 1316,171 1408,79 1523,79 1571,31 v2@1571,-119
  Bottom Layer w10: 960.8,1438.8 v1(1098.2,1438.8) ; v1(991,-53) 1028.26,-53 R74.1@1028.65,-53.39 R73.1@1089.34,-53.39 ; R73.1@1089.57,-53.16 R73.1@1089.34,-53.39 ; v1(1264.66,-55.35) 1262.7,-53.39 R73.1@1089.34,-53.39
  Bottom Layer w90: v2(982,1023) 953,1052 953,1150.99 934,1169.99 934,1819 980,1865 C34.1@1066,1865
  other v2: 1610,-147 951,974 997,977 1200,1960
  other v5: 1140,1837 1139,1885 1141,1955 1078,1957 1245,1958 1016,1959
VDD_1V8: Q4.1 Q6.1 R41.2 U5.15 | length 1737.6
  Top Layer w20: U5.15@2262.84,1050.32 2315.32,1050.32 2367,1102 2488,1102 2560,1174 2560,1617 2655,1712 v2(2762,1712)
  POWER w20: v2(2762,1712) 2762,1955 v2(2779.8,1972.8)
  Bottom Layer w20: Q6.1@2760,1925 2760,1953 v2(2779.8,1972.8) 2789,1982 2872.32,1982 2919.32,1935 2978,1935 2994,1919 Q4.1@2994,1884 2994,1860 3014.74,1839.26 R41.2@3014.74,1791
VDD_RF: C23.2 C24.2 C92.2 C94.2 C95.1 FB5.1 L5.1 U20.6 U20.8 | length 783.2
  Top Layer w15: C94.2@2534.32,342.65 C92.2@2590.32,342.65 C24.2@2647.32,342.65 2709.44,342.65 C23.2@2717.32,350.53 ; U20.8@2635.32,243.82 2635.32,284.32 2647.32,296.32 2647.32,339.94 2716.63,339.94 2717.32,339.26 2717.32,308.32 2674.69,265.69 U20.6@2674.69,243.82 ; L5.1@2797.1,312.01 C95.1@2847.1,312.01
  Top Layer w20: C23.2@2717.32,350.53 2758.58,350.53 L5.1@2797.1,312.01
  Bottom Layer w40: FB5.1@2717.32,308.32 v3@2884,308.32
  other v2: 2824,308.32
  other v3: 2884,307
VSIM: C10.2 SIM1.1 U2.6 U5.20 | length 616.6
  Top Layer w20: U5.20@2262.84,853.47 2312.53,853.47 2333,833 2541,833 2597,889 v1(2627,889)
  Bottom Layer w20: C10.2@2625.73,866.32 U2.6@2625.73,936.41 ; v1(2627,889) 2692.6,889 2716,912.4 SIM1.1@2768,912.4
pads on no net: Q1.6 S1.2 U1.7 U1.8 U1.9 U1.10 U4.3 U5.6 U5.7 U5.8 U5.9 U5.16 U5.21 U5.22 U5.23 U5.24 U5.25 U5.26 U5.27 U5.28 U5.29 U5.30 U5.31 U5.32 U5.33 U5.34 U5.35 U5.36 U5.42 U5.44 U5.45 U5.46 U5.47 U5.48 U5.49 U5.50 U5.52 U5.53 U5.54 U5.55 U5.56 U5.59 U5.66 U5.67 U5.69 U5.70 U5.73 U5.74 U5.75 U5.76 U5.83 U5.84 U5.85 U5.86 U5.87 U11.4 U13.2 U13.3 U13.4 U13.5 U13.7 U13.8 U13.9 U13.15 U13.23 U13.24 U13.25 U13.34 U13.35 U13.36 U13.38 U13.40 U13.41 U13.42 U13.43 U13.44 U13.45 U13.46 U13.51 U13.53 U13.54 U13.60 U13.61 U13.62 U13.64 U13.65 U13.67 U13.81 U13.82 U13.84 U13.88 U13.89 U13.90 U13.95 U13.97 U13.98 U20.7 U20.9 U20.10 U22.2 U22.3 U22.6 U22.7 USB.0 USB.6 USB.7
copper on no net: | length 145.3
  Top Layer w20: 1162.43,1472.94 1226.66,1472.94
  Bottom Layer w30: 1448.32,1251.43 1524.57,1251.43 1528,1248

## Polygon pours and split planes (outlines as drawn)
VCC_MCU_3.3V on POWER "POWER-No Net" (solid, remove dead copper, pour order 1000): -128.06,2236.38 -99.06,2265.38 3977.94,2265.38 3977.94,-183.62 3910.94,-250.62 3891.94,-269.62 -128.06,-269.62 -128.06,2246.38 -107.06,2267.38
GND on Top Layer "POWER-No Net" (solid, remove dead copper, pour order 1001): -92.03,2213.82 3909.97,2213.82 3937.97,2185.82 3915.97,2163.82 3915.97,-144.18 3915.97,-188.18 3854.97,-249.18 3849.97,-254.18 287.97,-254.18 -125.03,-254.18 -153.03,-226.18 -92.03,-165.18 -92.03,2213.82
GND on Bottom Layer "POWER-No Net" (solid, remove dead copper, pour order 1002): -139.63,2147.23 3862.37,2147.23 3890.37,2119.23 3868.37,2097.23 3868.37,-210.77 3868.37,-254.77 3807.37,-315.77 3802.37,-320.77 240.37,-320.77 -172.63,-320.77 -200.63,-292.77 -139.63,-231.77 -139.63,2147.23
GND on Mid-Layer 2 "POWER-No Net" (solid, remove dead copper, pour order 1000): -53.43,2183.65 -27.43,2157.65 3909.57,2157.65 3909.57,-263.35 3917.57,-271.35 3899.57,-253.35 -79.43,-253.35 -79.43,2132.65 -39.43,2172.65

## Keep-outs
Keep-Out Layer:
  lines w5: -60.68,-227 -60.68,2113 3854.32,2113 3854.32,-227 -60.68,-227

## Other copper
Top Layer:
  rectangle net VCC_LTE_3.8V: 3140,493 3206,692
  rectangle net NetC40_1: 652,925 702,996.73
  rectangle net NetC2_1: 471,1646 558,1700
  rectangle net NetC40_1: 690,925 771,1058
  rectangle net NetQ5_3: 1387,57 1444,274
  rectangle net VCC_LTE_3.8V: 3085,399 3358,560
  rectangle net VCC_LTE_3.8V: 3101,683 3205,1638
  rectangle net VCC_LTE_3.8V: 3142,1669 3204,1816
  rectangle net Net3.3V_1: 470,762 512,949
  rectangle net Net3.3V_1: 423,851 490,949
  rectangle net Net3.3V_1: 490,853 550,949
  rectangle net VCC_OUT: 1114,1914 1219,1978
  rectangle net VCC_OUT: 1558,-160 1738,-76
  rectangle net VCC_OUT: 998,1818 1263,1978
  rectangle net VCC_LTE_3.8V: 2955.32,1592 3305,1706
  rectangle net GND: 540,610 586,827
  rectangle net GND: 814,1518 857,1564
  rectangle net GND: 893.48,468.42 1022.58,537.27
  rectangle net GND: 890,444 1006,479
  region net NetC2_1: 762,1642 767,1637 767,1621 763,1617 679,1617 633,1571 471,1571 471,1654 670,1654 682,1642
  region net NetC40_1: 714,41 1083,41 1099,57 1099,309 1088,320 980,320 974,314 975,313 975,206 939,170 717,170 702,155 702,53
  region net NetC105_2: 1650,272 1650,149 1664,135 1745,135 1754,126 1754,19 1740,5 1566,5 1552,19 1552,266 1558,272
  region net NetL17_2: 1261,144 1261,57 1273,45 1339,45 1341,43 1341,18 1335,12 1186,12 1164,34 1164,136 1172,144
  region net NetC37_1: 884.05,1884.05 878,1878 878,1727 897,1708 897,1674 906,1665 998,1665 1030,1633 1168,1633 1175.95,1640.95 1175.95,1736.05 1164,1748 995,1748 976.98,1766.02 976.98,1874.08 967,1884.05
  region net GND: 727,1871 808,1871 812,1867 812,1773 873,1712 873,1634 866,1627 803,1627 796,1634 796,1704 774,1726 734,1726 726,1734 726,1870
  region net POWER: 606,1143 791,1143 791,1248 794,1251 816,1251 818,1249 818,1172 822,1168 882,1168 891,1177 891,1250 895,1254 919,1254 922,1251 922,1090 913,1081 599,1081 592,1088 592,1129
  region net VCC_OUT: 840,1015 933,1015 950,1032 950,1069 959,1078 1010,1078 1019,1069 1019,972 997,950 843,950 834,959 834,1009
  region net NetL11_2: 621,755 662,755 675,742 795,742 795,710 665.08,710 654,702 623,702 620,705 620,754
  region net NetL11_1: 618,764 660,764 733,837 793,837 802,846 802,878 794,886 713,886 693,866 693,834 655,796 622,796 618,792
  region net POWER: 510,705 507,702 374,702 374,756 507,756 510,753
POWER:
  rectangle net NetC40_1: 692,923 775,1064
  rectangle net VCC_OUT: 935,958 1019,1039
  rectangle net VCC_OUT: 1002,1813 1273,1981
  rectangle net POWER: 690,1083 883,1139
  rectangle net POWER: 919,322 1138,371
  rectangle net VCC_LTE_3.8V: 3141,1650 3203,1783
  rectangle net VCC_LTE_3.8V: 2919,1568 3309,1706
Mid-Layer 2:
  rectangle net VCC_OUT: 1551,-166 1646,-46
  rectangle net VCC_OUT: 917,958 1019,1052
  rectangle net VCC_LTE_3.8V: 3084,397 3365,569
  rectangle net VCC_LTE_3.8V: 2885,1567 3307,1706
  rectangle net GND: 513,648 637,782
  rectangle net GND: 913,446 1037,556
  rectangle net GND: 920.24,428 1029,472.49
Bottom Layer:
  rectangle net NetAdapter_1: 249,1630 407,1727
  rectangle net NetC2_1: 471,1507.35 623,1789
  rectangle net NetAdapter_1: 213,1887 603,2025
  rectangle net VCC_MCU_3.3V: 559,856 648,958
  region net VCC_MCU_3.3V: 661.74,-52.65 661.74,37 627,37 627,-52.65
  rectangle net VCC_LTE_3.8V: 1200,789 1276,883
  rectangle net Net3.8V_1: 1143,715 1192,886
  rectangle net Net3.8V_1: 1144,374 1229,769
  rectangle net Net3.8V_1: 1014,390 1161,427
  rectangle net VCC_LTE_3.8V: 3085,400 3354.32,560
  rectangle net VCC_LTE_3.8V: 2819,1593 3306,1706
  rectangle net NetAdapter_1: 203,1478 343,2025
  rectangle net VCC_OUT: 985,1822 1278,1978
  region net POWER: 463,707 463,781 375,781 375,707
  rectangle net Net3.3V_1: 394,878 505,1012
  rectangle net Net3.3V_1: 469,786 505,900
  rectangle net Net3.3V_1: 496,864 550,952
  rectangle net VCC_OUT: 932,949 1018,1046
  rectangle net GND: 852,457 1080,520
  region net NetL10_2: 956,537 1000,537 1004,541 1004,616 961,659 961,724 958,727 929,727 925,723 925,640 952,613 952,541
  region net NetL10_1: 1057,726 1054,723 1054,662 1011,619 1011,541 1015,537 1041,537 1045,541 1045,583 1094,632 1094,723 1091,726
  region net Net3.8V_1: 1014,427 1075,427 1122,474 1148,474 1148,374 1097,374 1081,390 1014,390
  region net POWER: 954,427 1003,427 1005,425 1005,378 1021,362 1132,362 1141,353 1141,283 973,283 954,302

## Silkscreen, mask and mechanical layers (free items; w line width, h text height)
Top Overlay:
  lines w5: 440,94 593,94 593,536 440,536 440,94
  lines w15: 2492.32,-33 3256.09,-33 ; 2492.32,483.68 2492.32,553.61 3256.09,553.61 ; 3255.93,139 3256.15,311
  text "+: DC 6--36V" at 175,2002 h35
  text "-" at 518,1669 h35 r90
  text "+" at 454,1354 h35
  text "GAS" at 468,493 h35
  text "G" at 468,450 h35
  text "MOTO" at 468,405 h35
  text "3.3V" at 465,364 h35
  text "G" at 469,320 h35
  text "DQ" at 469,275 h35
  text "3.3V" at 466,234 h35
  text "G" at 467,190 h35
  text "+" at 358,151 h35
  text "RX" at 471,146 h35
  text "TX" at 468,101 h35
Top Solder:
  lines w20: 2492.32,-6 2492.32,65 ; 2492.32,386 2492.32,451 ; 2683,-33 2791,-33 ; 2936.39,555.6 3039.01,555.6 ; 3189,-33 3236,-33 ; 3256.09,26 3256.09,80 ; 3256.09,352 3256.09,474
Mechanical 1:
  the board outline again, w5

## Text inside footprints (layer, text, board x,y; h text height)
4G: Top Overlay "+" at 3822.32,513.5 h35 r180
433: Top Overlay "+" at 3822.32,676 h35 r180
BACK: Top Overlay "+" at 3822.32,26 h35 r180
GPS: Top Overlay "+" at 3822.32,351 h35 r180
PWR: Top Overlay "+" at 3822.32,188.5 h35 r180